# EAGLE board CT_schematic (EAGLE 7.6.0)

Size 100 x 80 mm. Coordinates in mm from the lower left corner, seen from the top.
Outline: 0,0 100,0 100,80 0,80 0,0
Copper layers (1*16): Top 0.035mm / dielectric 1.5mm / Bottom 0.035mm
Design rules "default": minimum track width 10mil, minimum drill 24mil, track to track 8mil, track to pad 8mil, pad to pad 8mil, via to via 8mil, smd to smd 8mil, copper to edge 40mil, drill to drill 8mil, minimum pad ring 10mil, minimum via ring 8mil, stop-mask expansion 4mil, vias tented up to drill 0mil, thermal gap 10mil

## Footprints (pad centres in the part's own frame; a part is rotated, then mirrored left to right if it is on the bottom)
C0603 = smd 0.8 x 0.8: 1 -0.762,0; 2 0.762,0
C0402 = smd 0.5 x 0.5: 1 -0.508,0; 2 0.508,0
C0805 = smd 1.2 x 1.3: 1 -1.016,0; 2 1.016,0
C1210 = smd 1.2 x 2.5: 1 -1.524,0; 2 1.524,0
R0603 = smd 0.8 x 0.8: 1 -0.762,0; 2 0.762,0
EXV-9H = smd 3.505 x 1.676: 1 -2.857,0; 2 2.857,0
L0603 = smd 0.8 x 0.8: 1 -0.762,0; 2 0.762,0
IND25X25CZ = smd 2.489 x 3.429: 1 -2.718,0; 2 2.718,0
PJ-037B_PACKAGE = drill 3.7 square: 1 12,0 | drill 3.2 square: 2 6,0
UFBGA100 = smd 0.28 x 0.28: A1 -2.75,2.75; A2 -2.25,2.75; A3 -1.75,2.75; A4 -1.25,2.75; A5 -0.75,2.75; A6 -0.25,2.75; A7 0.25,2.75; A8 0.75,2.75; A9 1.25,2.75; A10 1.75,2.75; A11 2.25,2.75; A12 2.75,2.75; B1 -2.75,2.25; B2 -2.25,2.25; B3 -1.75,2.25; B4 -1.25,2.25; B5 -0.75,2.25; B6 -0.25,2.25; B7 0.25,2.25; B8 0.75,2.25; B9 1.25,2.25; B10 1.75,2.25; B11 2.25,2.25; B12 2.75,2.25; C1 -2.75,1.75; C2 -2.25,1.75; C3 -1.75,1.75; C4 -1.25,1.75; C5 -0.75,1.75; C8 0.75,1.75; C9 1.25,1.75; C10 1.75,1.75; C11 2.25,1.75; C12 2.75,1.75; D1 -2.75,1.25; D2 -2.25,1.25; D3 -1.75,1.25; D10 1.75,1.25; D11 2.25,1.25; D12 2.75,1.25; E1 -2.75,0.75; E2 -2.25,0.75; E3 -1.75,0.75; E10 1.75,0.75; E11 2.25,0.75; E12 2.75,0.75; F1 -2.75,0.25; F2 -2.25,0.25; F11 2.25,0.25; F12 2.75,0.25; G1 -2.75,-0.25; G2 -2.25,-0.25; G11 2.25,-0.25; G12 2.75,-0.25; H1 -2.75,-0.75; H2 -2.25,-0.75; H3 -1.75,-0.75; H10 1.75,-0.75; H11 2.25,-0.75; H12 2.75,-0.75; J1 -2.75,-1.25; J2 -2.25,-1.25; J3 -1.75,-1.25; J10 1.75,-1.25; J11 2.25,-1.25; J12 2.75,-1.25; K1 -2.75,-1.75; K2 -2.25,-1.75; K3 -1.75,-1.75; K4 -1.25,-1.75; K5 -0.75,-1.75; K8 0.75,-1.75; K9 1.25,-1.75; K10 1.75,-1.75; K11 2.25,-1.75; K12 2.75,-1.75; L1 -2.75,-2.25; L2 -2.25,-2.25; L3 -1.75,-2.25; L4 -1.25,-2.25; L5 -0.75,-2.25; L6 -0.25,-2.25; L7 0.25,-2.25; L8 0.75,-2.25; L9 1.25,-2.25; L10 1.75,-2.25; L11 2.25,-2.25; L12 2.75,-2.25; M1 -2.75,-2.75; M2 -2.25,-2.75; M3 -1.75,-2.75; M4 -1.25,-2.75; M5 -0.75,-2.75; M6 -0.25,-2.75; M7 0.25,-2.75; M8 0.75,-2.75; M9 1.25,-2.75; M10 1.75,-2.75; M11 2.25,-2.75; M12 2.75,-2.75
SSOP-28 = smd 1.5 x 0.4: 1 -3.625,4.225; 2 -3.625,3.575; 3 -3.625,2.925; 4 -3.625,2.275; 5 -3.625,1.625; 6 -3.625,0.975; 7 -3.625,0.325; 8 -3.625,-0.325; 9 -3.625,-0.975; 10 -3.625,-1.625; 11 -3.625,-2.275; 12 -3.625,-2.925; 13 -3.625,-3.575; 14 -3.625,-4.225; 15 3.625,-4.225; 16 3.625,-3.575; 17 3.625,-2.925; 18 3.625,-2.275; 19 3.625,-1.625; 20 3.625,-0.975; 21 3.625,-0.325; 22 3.625,0.325; 23 3.625,0.975; 24 3.625,1.625; 25 3.625,2.275; 26 3.625,2.925; 27 3.625,3.575; 28 3.625,4.225
FCI_10118193-0001LF = smd 0.4 x 1.35: 1 -1.3,2.675; 2 -0.65,2.675; 3 0,2.675; 4 0.65,2.675; 5 1.3,2.675 | smd 1.6 x 1.4: 6 -3.2,2.45; 7 3.2,2.45 | smd 1.9 x 1.9: 8 -1.2,0; 9 1.2,0 | hole 0.5: -3.3,0; 3.3,0
TST-110-05-T-D-RA = drill 1 pad 1.7 square: 1 0,0 | drill 1 pad 1.7: 2 0,2.54; 3 2.54,0; 4 2.54,2.54; 5 5.08,0; 6 5.08,2.54; 7 7.62,0; 8 7.62,2.54; 9 10.16,0; 10 10.16,2.54; 11 12.7,0; 12 12.7,2.54; 13 15.24,0; 14 15.24,2.54; 15 17.78,0; 16 17.78,2.54; 17 20.32,0; 18 20.32,2.54; 19 22.86,0; 20 22.86,2.54
TFBGA-153 = smd 0.3 x 0.3: A1 -3.25,3.25; A2 -2.75,3.25; A3 -2.25,3.25; A4 -1.75,3.25; A5 -1.25,3.25; A6 -0.75,3.25; A7 -0.25,3.25; A8 0.25,3.25; A9 0.75,3.25; A10 1.25,3.25; A11 1.75,3.25; A12 2.25,3.25; A13 2.75,3.25; A14 3.25,3.25; B1 -3.25,2.75; B2 -2.75,2.75; B3 -2.25,2.75; B4 -1.75,2.75; B5 -1.25,2.75; B6 -0.75,2.75; B7 -0.25,2.75; B8 0.25,2.75; B9 0.75,2.75; B10 1.25,2.75; B11 1.75,2.75; B12 2.25,2.75; B13 2.75,2.75; B14 3.25,2.75; C1 -3.25,2.25; C2 -2.75,2.25; C3 -2.25,2.25; C4 -1.75,2.25; C5 -1.25,2.25; C6 -0.75,2.25; C7 -0.25,2.25; C8 0.25,2.25; C9 0.75,2.25; C10 1.25,2.25; C11 1.75,2.25; C12 2.25,2.25; C13 2.75,2.25; C14 3.25,2.25; D1 -3.25,1.75; D2 -2.75,1.75; D3 -2.25,1.75; D4 -1.75,1.75; D12 2.25,1.75; D13 2.75,1.75; D14 3.25,1.75; E1 -3.25,1.25; E2 -2.75,1.25; E3 -2.25,1.25; E5 -1.25,1.25; E6 -0.75,1.25; E7 -0.25,1.25; E8 0.25,1.25; E9 0.75,1.25; E10 1.25,1.25; E12 2.25,1.25; E13 2.75,1.25; E14 3.25,1.25; F1 -3.25,0.75; F2 -2.75,0.75; F3 -2.25,0.75; F5 -1.25,0.75; F10 1.25,0.75; F12 2.25,0.75; F13 2.75,0.75; F14 3.25,0.75; G1 -3.25,0.25; G2 -2.75,0.25; G3 -2.25,0.25; G5 -1.25,0.25; G10 1.25,0.25; G12 2.25,0.25; G13 2.75,0.25; G14 3.25,0.25; H1 -3.25,-0.25; H2 -2.75,-0.25; H3 -2.25,-0.25; H5 -1.25,-0.25; H10 1.25,-0.25; H12 2.25,-0.25; H13 2.75,-0.25; H14 3.25,-0.25; J1 -3.25,-0.75; J2 -2.75,-0.75; J3 -2.25,-0.75; J5 -1.25,-0.75; J10 1.25,-0.75; J12 2.25,-0.75; J13 2.75,-0.75; J14 3.25,-0.75; K1 -3.25,-1.25; K2 -2.75,-1.25; K3 -2.25,-1.25; K5 -1.25,-1.25; K6 -0.75,-1.25; K7 -0.25,-1.25; K8 0.25,-1.25; K9 0.75,-1.25; K10 1.25,-1.25; K12 2.25,-1.25; K13 2.75,-1.25; K14 3.25,-1.25; L1 -3.25,-1.75; L2 -2.75,-1.75; L3 -2.25,-1.75; L12 2.25,-1.75; L13 2.75,-1.75; L14 3.25,-1.75; M1 -3.25,-2.25; M2 -2.75,-2.25; M3 -2.25,-2.25; M4 -1.75,-2.25; M5 -1.25,-2.25; M6 -0.75,-2.25; M7 -0.25,-2.25; M8 0.25,-2.25; M9 0.75,-2.25; M10 1.25,-2.25; M11 1.75,-2.25; M12 2.25,-2.25; M13 2.75,-2.25; M14 3.25,-2.25; N1 -3.25,-2.75; N2 -2.75,-2.75; N3 -2.25,-2.75; N4 -1.75,-2.75; N5 -1.25,-2.75; N6 -0.75,-2.75; N7 -0.25,-2.75; N8 0.25,-2.75; N9 0.75,-2.75; N10 1.25,-2.75; N11 1.75,-2.75; N12 2.25,-2.75; N13 2.75,-2.75; N14 3.25,-2.75; P1 -3.25,-3.25; P2 -2.75,-3.25; P3 -2.25,-3.25; P4 -1.75,-3.25; P5 -1.25,-3.25; P6 -0.75,-3.25; P7 -0.25,-3.25; P8 0.25,-3.25; P9 0.75,-3.25; P10 1.25,-3.25; P11 1.75,-3.25; P12 2.25,-3.25; P13 2.75,-3.25; P14 3.25,-3.25
ABS07-32.768KHZ-7-T = smd 1.1 x 2.4: 1 -2.5,0; 2 0,0
ABLS-25.000MHZ-B2F-T = smd 5.6 x 2.8: 1 -3.81,0; 2 5.69,0
ABLS-12.000MHZ-B4-T = smd 5.6 x 2.8: 1 0,0; 2 9.5,0
IR3899MTR1PBF = smd 0.25 x 0.75: 1 0,0; 2 0.5,0; 3 1,0; 4 1.5,0; 5 2,0; 6 2.5,0; 7 3,0 | smd 0.75 x 0.25: 8 3.425,0.78; 9 3.425,1.28; 10 3.425,1.78; 14 -0.425,1.78; 15 -0.425,1.28; 16 -0.425,0.78 | smd 0.3 x 1.95: 11 3.22,3.63 | smd 1.62 x 2.42: 12 1.786,3.8 | smd 1 x 1.95: 13 0.117,3.63 | smd 2.19 x 1.25: 17 1.51,1.26
SON-6 = smd 0.55 x 0.3: 1 -0.355,0.5 | smd 0.52 x 0.3: 2 -0.37,0; 3 -0.37,-0.5; 4 0.37,-0.5; 5 0.37,0; 6 0.37,0.5
SW_4-1437565-2 = smd 1.4 x 2.1: 1 -2.23,4.55; 2 -2.23,-4.55; 3 2.23,4.55; 4 2.23,-4.55
LGM67K-G1J2-24-Z = smd 0.8 x 1.4: A -2,0; C 0,0
NC7SZ125M5X = smd 1.3 x 0.7: 1 -1.3,0.95; 2 -1.3,0; 3 -1.3,-0.95; 4 1.3,-0.95; 5 1.3,0.95
DUMMY_PACKAGE_207 = drill 0.3: 1 0,-1; 2 1.5,-1; 3 3,-1

## Placement (x,y rotation side)
C1  1e-06  [C0603]  -26.67,71.12 0 top  (outside the outline)
C2  1e-07  [C0603]  -30.48,71.12 0 top  (outside the outline)
C3  1e-07  [C0603]  -34.29,71.12 0 top  (outside the outline)
C4  1e-07  [C0603]  -38.1,71.12 0 top  (outside the outline)
C5  1e-07  [C0603]  -41.91,71.12 0 top  (outside the outline)
C6  1e-07  [C0603]  -45.72,71.12 0 top  (outside the outline)
C7  1e-07  [C0603]  -49.53,71.12 0 top  (outside the outline)
C8  4.7e-06  [C0603]  -59.69,66.04 0 top  (outside the outline)
C9  1e-08  [C0603]  -53.34,71.12 0 top  (outside the outline)
C10  1e-06  [C0603]  -57.15,71.12 0 top  (outside the outline)
C11  2.2e-06  [C0603]  -63.5,66.04 0 top  (outside the outline)
C12  2.2e-06  [C0603]  -67.31,66.04 0 top  (outside the outline)
C13  1e-11  [C0402]  -34.29,76.2 0 top  (outside the outline)
C14  1e-11  [C0402]  -38.1,76.2 0 top  (outside the outline)
C15  1e-11  [C0402]  -41.91,76.2 0 top  (outside the outline)
C16  1e-11  [C0402]  -45.72,76.2 0 top  (outside the outline)
C17  1e-07  [C0402]  -49.53,76.2 0 top  (outside the outline)
C18  4.7e-06  [C0805]  -72.39,48.26 0 top  (outside the outline)
C19  1e-07  [C0402]  -53.34,76.2 0 top  (outside the outline)
C20  1e-07  [C0402]  -57.15,76.2 0 top  (outside the outline)
C21  1e-07  [C0402]  -60.96,76.2 0 top  (outside the outline)
C22  1e-07  [C0402]  -64.77,76.2 0 top  (outside the outline)
C23  1e-07  [C0402]  -68.58,76.2 0 top  (outside the outline)
C24  2.2e-06  [C0603]  -71.12,66.04 0 top  (outside the outline)
C25  2.2e-06  [C0603]  -74.93,66.04 0 top  (outside the outline)
C26  1e-07  [C0402]  -72.39,76.2 0 top  (outside the outline)
C27  1e-07  [C0402]  -76.2,76.2 0 top  (outside the outline)
C28  2.2e-06  [C0603]  -15.24,71.12 0 top  (outside the outline)
C29  0.0001  [C1210]  -48.26,49.53 0 top  (outside the outline)
C30  2.2e-06  [C0603]  -19.05,71.12 0 top  (outside the outline)
C31  1e-07  [C0402]  -15.24,81.28 0 top  (outside the outline)
C32  1e-07  [C0402]  -19.05,81.28 0 top  (outside the outline)
C33  7.8444498006919e-09  [R0603]  -20.32,55.88 0 top  (outside the outline)
C34  2.7e-07  [C0603]  -22.86,71.12 0 top  (outside the outline)
C37  1e-07  [C0402]  -22.86,81.28 0 top  (outside the outline)
C38  0.0001  [EXV-9H]  -54.61,34.29 0 top  (outside the outline)
C39  0.0001  [EXV-9H]  -66.04,34.29 0 top  (outside the outline)
C40  1e-08  [C0402]  -26.67,81.28 0 top  (outside the outline)
C41  1e-08  [C0402]  -30.48,81.28 0 top  (outside the outline)
C42  1e-08  [C0402]  -34.29,81.28 0 top  (outside the outline)
F1  240.0  [L0603]  -60.96,71.12 0 top  (outside the outline)
I1  6.8e-07  [IND25X25CZ]  -58.42,41.91 0 top  (outside the outline)
J1  PJ-037B  [PJ-037B_PACKAGE]  -55.88,7.62 0 top  (outside the outline)
R2  1000.0  [R0603]  -64.77,71.12 0 top  (outside the outline)
R7  4700.0  [R0603]  -68.58,71.12 0 top  (outside the outline)
R8  4700.0  [R0603]  -72.39,71.12 0 top  (outside the outline)
R9  10000.0  [R0603]  -58.42,55.88 0 top  (outside the outline)
R10  10000.0  [R0603]  -63.5,55.88 0 top  (outside the outline)
R11  10000.0  [R0603]  -68.58,55.88 0 top  (outside the outline)
R12  4700.0  [R0603]  -15.24,76.2 0 top  (outside the outline)
R13  10000.0  [R0603]  -73.66,55.88 0 top  (outside the outline)
R14  10000.0  [R0603]  -15.24,60.96 0 top  (outside the outline)
R15  10000.0  [R0603]  -20.32,60.96 0 top  (outside the outline)
R16  10000.0  [R0603]  -25.4,60.96 0 top  (outside the outline)
R17  10000.0  [R0603]  -30.48,60.96 0 top  (outside the outline)
R18  10000.0  [R0603]  -35.56,60.96 0 top  (outside the outline)
R19  10000.0  [R0603]  -40.64,60.96 0 top  (outside the outline)
R20  10000.0  [R0603]  -45.72,60.96 0 top  (outside the outline)
R21  34000.0  [R0603]  -50.8,60.96 0 top  (outside the outline)
R22  34000.0  [R0603]  -55.88,60.96 0 top  (outside the outline)
R23  34000.0  [R0603]  -60.96,60.96 0 top  (outside the outline)
R24  34000.0  [R0603]  -66.04,60.96 0 top  (outside the outline)
R25  34000.0  [R0603]  -71.12,60.96 0 top  (outside the outline)
R26  34000.0  [R0603]  -15.24,66.04 0 top  (outside the outline)
R27  34000.0  [R0603]  -20.32,66.04 0 top  (outside the outline)
R28  34000.0  [R0603]  -25.4,66.04 0 top  (outside the outline)
R29  34000.0  [R0603]  -30.48,66.04 0 top  (outside the outline)
R30  34000.0  [R0603]  -35.56,66.04 0 top  (outside the outline)
R31  0.1  [R0603]  -19.05,76.2 0 top  (outside the outline)
R32  4030.2416170974  [R0603]  -27.94,55.88 0 top  (outside the outline)
R33  719.68600305311  [R0603]  -35.56,55.88 0 top  (outside the outline)
R34  64.984347826087  [R0603]  -43.18,55.88 0 top  (outside the outline)
R35  130.0  [R0603]  -22.86,76.2 0 top  (outside the outline)
R36  39000.0  [R0603]  -40.64,66.04 0 top  (outside the outline)
R37  49900.0  [R0603]  -45.72,66.04 0 top  (outside the outline)
R38  5600.0  [R0603]  -26.67,76.2 0 top  (outside the outline)
R39  10000.0  [R0603]  -50.8,66.04 0 top  (outside the outline)
R40  10000.0  [R0603]  -55.88,66.04 0 top  (outside the outline)
R41  9100.0  [R0603]  -30.48,76.2 0 top  (outside the outline)
R42  680000.0  [R0603]  -48.26,55.88 0 top  (outside the outline)
R43  120000.0  [R0603]  -53.34,55.88 0 top  (outside the outline)
U1  STM32F401VBH6  [UFBGA100]  -25.4,24.13 0 top  (outside the outline)
U2  FT232RL-REEL  [SSOP-28]  -35.56,7.62 0 top  (outside the outline)
U3  10118193-0001LF  [FCI_10118193-0001LF]  -49.53,21.59 0 top  (outside the outline)
U4  TST-110-05-T-D-RA  [TST-110-05-T-D-RA]  -46.99,31.75 0 top  (outside the outline)
U5  mtfc4gmcdm  [TFBGA-153]  -20.32,8.89 0 top  (outside the outline)
U6  ABS07-32.768KHZ-7-T  [ABS07-32.768KHZ-7-T]  -27.94,49.53 0 top  (outside the outline)
U7  ABLS-25.000MHZ-B2F-T  [ABLS-25.000MHZ-B2F-T]  -26.67,41.91 0 top  (outside the outline)
U8  ABLS-12.000MHZ-B4-T  [ABLS-12.000MHZ-B4-T]  -50.8,41.91 0 top  (outside the outline)
U9  IR3899MTR1PBF  [IR3899MTR1PBF]  -41.91,20.32 0 top  (outside the outline)
U10  TPS3895ADRYR  [SON-6]  -43.18,80.01 0 top  (outside the outline)
U11  4-1437565-2  [SW_4-1437565-2]  -72.39,6.35 0 top  (outside the outline)
U12  Q65110A2395  [LGM67K-G1J2-24-Z]  -36.83,49.53 0 top  (outside the outline)
U13  nc7sz125m5x  [NC7SZ125M5X]  -53.34,48.26 0 top  (outside the outline)
U14  nc7sz125m5x  [NC7SZ125M5X]  -59.69,48.26 0 top  (outside the outline)
U15  nc7sz125m5x  [NC7SZ125M5X]  -66.04,48.26 0 top  (outside the outline)
U16  Dummy  [DUMMY_PACKAGE_207]  -40.64,81.28 0 top  (outside the outline)

## Library data of the parts
C1-C34 C37-C42 F1 I1 J1 R2 R7-R43 U1-U16 = circuit_tree

## Nets
CLK_CRYSTAL_U1_D1: C13.1 U1.D1 U6.1
CLK_CRYSTAL_U1_E1: C14.1 U1.E1 U6.2
CLK_CRYSTAL_U1_F1: C15.1 U1.F1 U7.1
CLK_CRYSTAL_U1_G1: C16.1 U1.G1 U7.2
CLK_CRYSTAL_U2_27: U2.27 U8.1
CLK_CRYSTAL_U2_28: U2.28 U8.2
GND: C1.2 C2.2 C3.2 C4.2 C5.2 C6.2 C7.2 C8.2 C9.2 C10.2 C11.2 C12.2 C13.2 C14.2 C15.2 C16.2 C17.2 C18.2 C19.2 C20.2 C21.2 C22.2 C23.2 C24.2 C25.2 C26.2 C27.2 C28.2 C30.2 C31.2 C32.2 C37.2 C38.2 C39.2 C40.2 C41.2 C42.2 J1.2 R2.2 R9.2 R11.2 R14.2 R20.2 R31.1 R31.2 R33.2 R36.2 R38.2 R41.2 R43.2 U1.D3 U1.F2 U1.F11 U1.F12 U1.J1 U1.K1 U2.7 U2.18 U2.21 U2.25 U2.26 U3.5 U3.6 U3.7 U3.8 U3.9 U4.4 U4.6 U4.8 U4.10 U4.12 U4.14 U4.16 U4.18 U4.20 U5.C4 U5.E7 U5.G5 U5.H10 U5.K8 U5.N2 U5.N5 U5.P4 U5.P6 U9.4 U9.11 U9.17 U10.2 U12.C U13.2 U13.3 U14.1 U14.3 U15.1 U15.3 U16.1
NET_U1_A4: R9.1 U1.A4
NET_U1_C11: C12.1 U1.C11
NET_U1_E3: R11.1 U1.E3
NET_U1_H2: R8.1 U1.H2 U15.4
NET_U1_H3: R10.1 U1.H3
NET_U1_L11: C11.1 U1.L11
NET_U1_M1: C9.1 C10.1 F1.1 U1.L1 U1.M1
NET_U1_M11: U12.A
NET_U1_M12: U11.3 U11.4
NET_U2_14: R13.1 U2.14
NET_U2_17: C19.1 U2.17
NET_U2_19: R14.1 U2.19
NET_U3_1: R12.1 U3.1
NET_U3_2: U2.16 U3.2
NET_U3_3: U2.15 U3.3
NET_U3_19: R12.2
NET_U4_19: R20.1 U4.19
NET_U5_C2: C25.1 C26.1 U5.C2
NET_U5_K5: R7.1 U5.K5 U14.4
NET_U9_1: C33.1 R32.1 R33.1 R34.1 R35.1 U9.1 U9.8
NET_U9_2: C32.1 U9.2
NET_U9_3: C33.2 C34.1 C34.2 U9.3
NET_U9_5: R36.1 U9.5
NET_U9_10: C30.1 U9.10
NET_U9_12: C29.1 I1.1 U9.12
NET_U9_13: U9.13
NET_U9_14: C29.2 U9.14
NET_U9_15: R37.1 R38.1 U9.15
NET_U9_ATNET_3: I1.2 R32.2
NET_U9_ATNET_4: C34.2 R34.2
NET_U9_ATNET_5: R35.2
NET_U10_1: R40.1 R41.1 U10.1
NET_U10_3: R42.2 R43.1 U10.3
NET_U10_4: R39.1 U10.4 U13.4 U14.2 U15.2
NET_U11_1: R2.1 U11.1 U11.2
PROC_ADC1_IN1: U1.M2 U16.3
PROC_ADC1_IN2: U1.K3 U16.2
PROC_SDIO_CK: R30.1 U1.B10 U5.M6
PROC_SDIO_CMD: R29.1 U1.C8 U5.M5
PROC_SDIO_D0: R21.1 U1.E10 U5.A3
PROC_SDIO_D1: R22.1 U1.D12 U5.A4
PROC_SDIO_D2: R23.1 U1.B11 U5.A5
PROC_SDIO_D3: R24.1 U1.C10 U5.B2
PROC_SDIO_D4: R25.1 U1.A3 U5.B3
PROC_SDIO_D5: R26.1 U1.B3 U5.B4
PROC_SDIO_D6: R27.1 U1.E12 U5.B5
PROC_SDIO_D7: R28.1 U1.E11 U5.B6
PROC_SYS_JTCK_SWCLK: R18.1 U1.A10 U4.9
PROC_SYS_JTDI: R16.1 U1.A9 U4.5
PROC_SYS_JTDO_SWO: U1.A8 U4.13
PROC_SYS_JTMS_SWDIO: R17.1 U1.A11 U4.7
PROC_SYS_JTRST: R15.1 U1.A7 U4.3
PROC_USART1_CTS: U1.B12 U2.3
PROC_USART1_RTS: U1.A12 U2.11
PROC_USART1_RX: U1.B4 U2.1
PROC_USART1_TX: U1.B5 U2.5
RST_OUT_U4_SRESET_B: R19.1 U4.15 U13.1
VCC_S1_16V1: C31.1 C38.1 C39.1 J1.1 R37.2 U9.9
VCC_TIER1_3V3: C1.1 C2.1 C3.1 C4.1 C5.1 C6.1 C7.1 C8.1 C17.1 C18.1 C20.1 C21.1 C22.1 C23.1 C24.1 C27.1 C28.1 C37.1 C40.1 C41.1 C42.1 F1.2 I1.2 R7.2 R8.2 R10.2 R13.2 R15.2 R16.2 R17.2 R18.2 R19.2 R21.2 R22.2 R23.2 R24.2 R25.2 R26.2 R27.2 R28.2 R29.2 R30.2 R32.2 R39.2 R40.2 R42.1 U1.C4 U1.E2 U1.G2 U1.G11 U1.G12 U2.4 U2.20 U4.1 U4.2 U5.C6 U5.E6 U5.F5 U5.J10 U5.K9 U5.M4 U5.N4 U5.P3 U5.P5 U10.6 U13.5 U14.5 U15.5

## Tracks (layer width: path | path; a pad name or v marks a point on that pad's centre or on a via)
CLK_CRYSTAL_U1_D1  (2 unrouted)
CLK_CRYSTAL_U1_E1  (2 unrouted)
CLK_CRYSTAL_U1_F1  (2 unrouted)
CLK_CRYSTAL_U1_G1  (2 unrouted)
CLK_CRYSTAL_U2_27  (1 unrouted)
CLK_CRYSTAL_U2_28  (1 unrouted)
GND  (95 unrouted)
NET_U1_A4  (1 unrouted)
NET_U1_C11  (1 unrouted)
NET_U1_E3  (1 unrouted)
NET_U1_H2  (2 unrouted)
NET_U1_H3  (1 unrouted)
NET_U1_L11  (1 unrouted)
NET_U1_M1  (4 unrouted)
NET_U1_M12  (1 unrouted)
NET_U2_14  (1 unrouted)
NET_U2_17  (1 unrouted)
NET_U2_19  (1 unrouted)
NET_U3_1  (1 unrouted)
NET_U3_2  (1 unrouted)
NET_U3_3  (1 unrouted)
NET_U4_19  (1 unrouted)
NET_U5_C2  (2 unrouted)
NET_U5_K5  (2 unrouted)
NET_U9_1  (6 unrouted)
NET_U9_2  (1 unrouted)
NET_U9_3  (3 unrouted)
NET_U9_5  (1 unrouted)
NET_U9_10  (1 unrouted)
NET_U9_12  (2 unrouted)
NET_U9_14  (1 unrouted)
NET_U9_15  (2 unrouted)
NET_U9_ATNET_3  (1 unrouted)
NET_U9_ATNET_4  (1 unrouted)
NET_U10_1  (2 unrouted)
NET_U10_3  (2 unrouted)
NET_U10_4  (4 unrouted)
NET_U11_1  (2 unrouted)
PROC_ADC1_IN1  (1 unrouted)
PROC_ADC1_IN2  (1 unrouted)
PROC_SDIO_CK  (2 unrouted)
PROC_SDIO_CMD  (2 unrouted)
PROC_SDIO_D0  (2 unrouted)
PROC_SDIO_D1  (2 unrouted)
PROC_SDIO_D2  (2 unrouted)
PROC_SDIO_D3  (2 unrouted)
PROC_SDIO_D4  (2 unrouted)
PROC_SDIO_D5  (2 unrouted)
PROC_SDIO_D6  (2 unrouted)
PROC_SDIO_D7  (2 unrouted)
PROC_SYS_JTCK_SWCLK  (2 unrouted)
PROC_SYS_JTDI  (2 unrouted)
PROC_SYS_JTDO_SWO  (1 unrouted)
PROC_SYS_JTMS_SWDIO  (2 unrouted)
PROC_SYS_JTRST  (2 unrouted)
PROC_USART1_CTS  (1 unrouted)
PROC_USART1_RTS  (1 unrouted)
PROC_USART1_RX  (1 unrouted)
PROC_USART1_TX  (1 unrouted)
RST_OUT_U4_SRESET_B  (2 unrouted)
VCC_S1_16V1  (5 unrouted)
VCC_TIER1_3V3  (67 unrouted)